# Altium PCB UL-SWAP-DAQ-1.PcbDoc (part 1 of 2)
Units mil, origin at the board's own origin, x right, y up, seen from the top; angles counter-clockwise.
Board outline 4000 x 4000 mil, 2 copper layers (Top Layer, Bottom Layer); 116 components, 150 nets, 387 pads, 16 vias.
Unrouted connection lines stored in the file: 128.
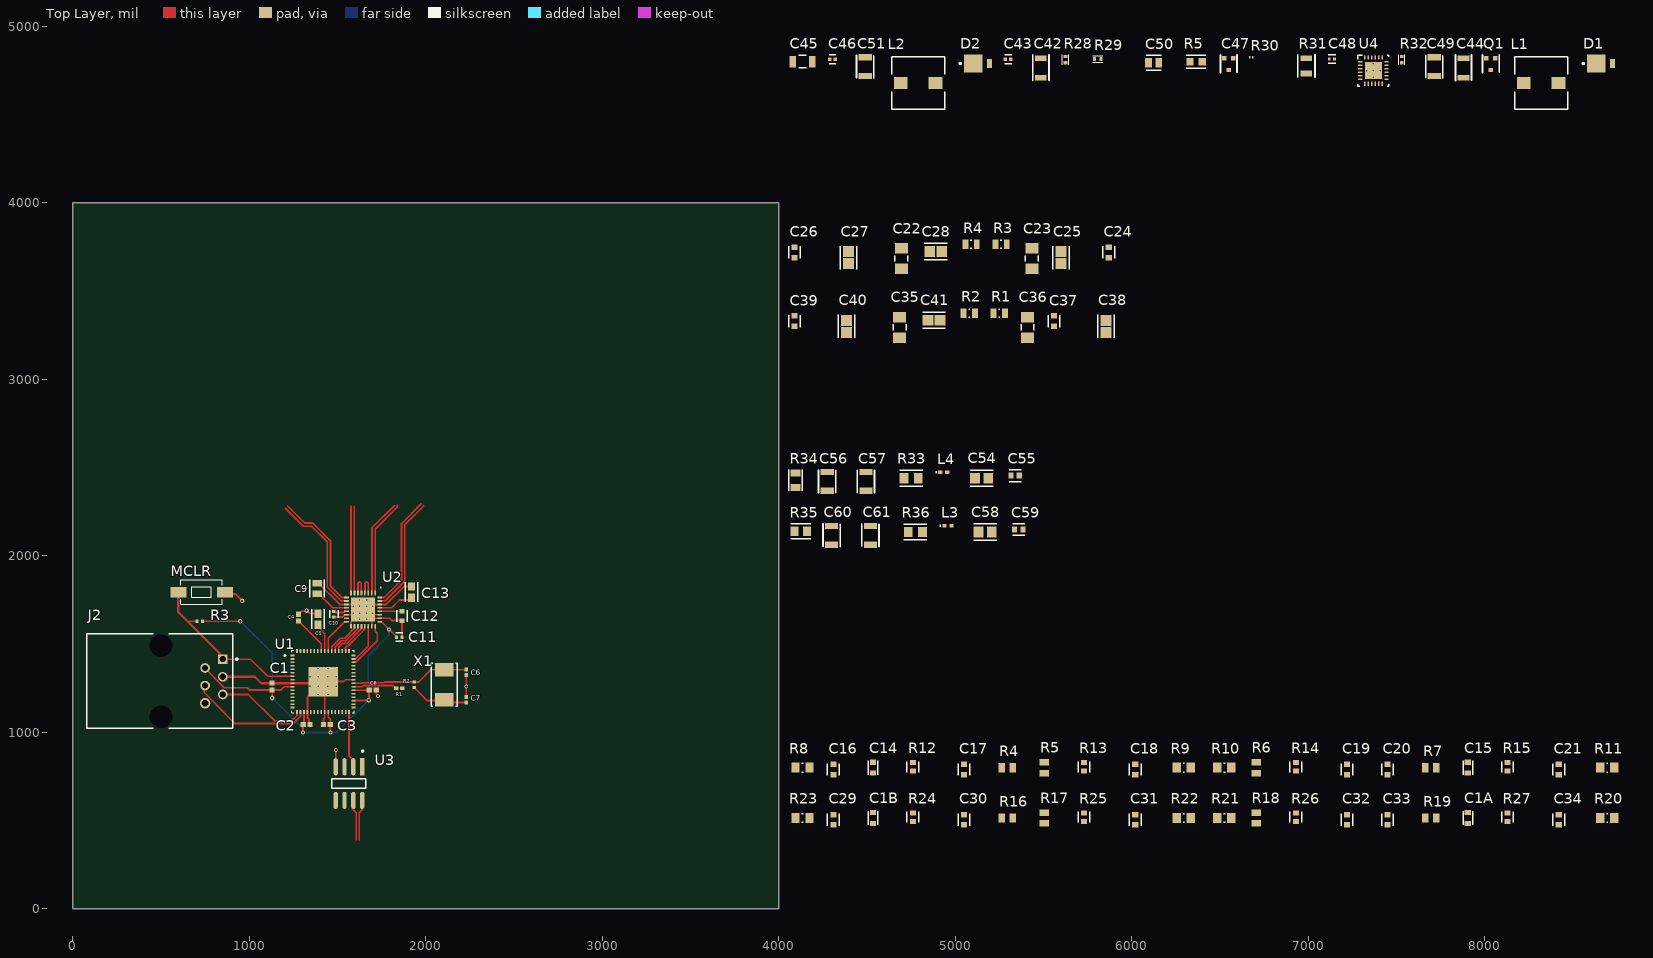
[diagram p0: Top Layer view]
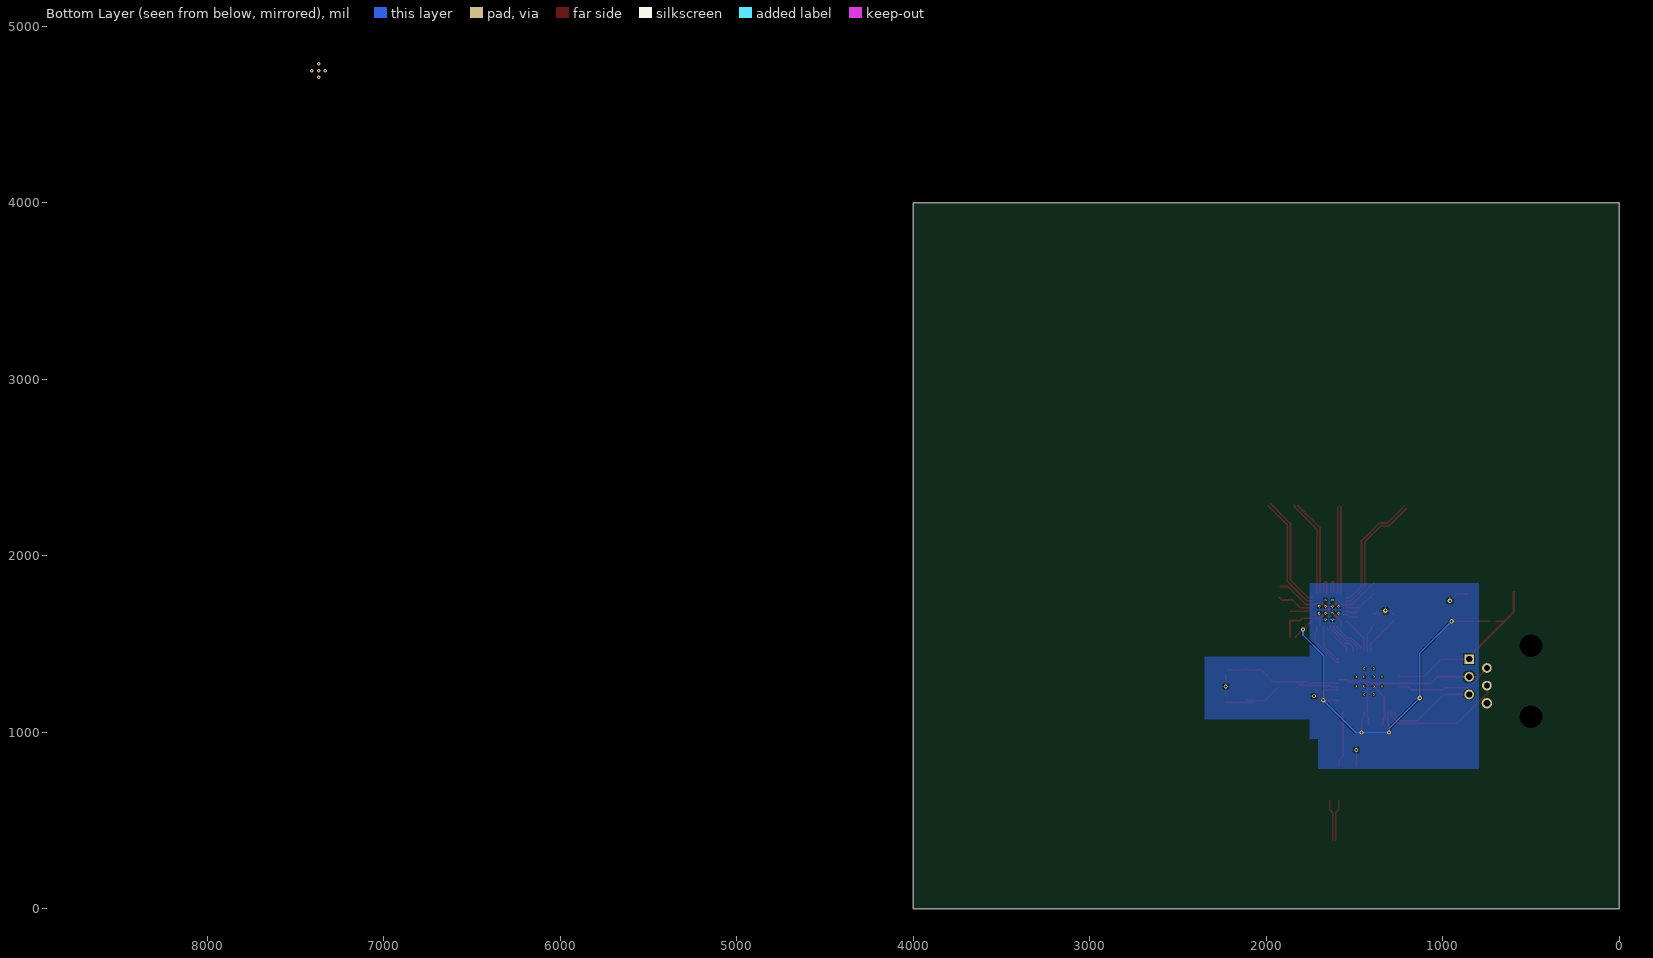
[diagram p1: Bottom Layer view, seen from below]

## Layer stack, top to bottom
Top Solder: solder mask 0.4, Solder Resist, Dk 3.5
Top Layer: signal copper 1.4
Dielectric 1: dielectric 12.6, FR-4, Dk 4.8
Bottom Layer: signal copper 1.4
Bottom Solder: solder mask 0.4, Solder Resist, Dk 3.5

## Board outline
0,0 4000,0 4000,4000 0,4000

## Design rules (kind name [scope] priority, off if disabled: settings)
Clearance [All] p1: gap=5 ignorepadtopadclearanceinfootprint=FALSE
DiffPairsRouting [All] p1: maxlimit=10 minlimit=5 mostfreqgap=8 toplayer_minwidth=5 toplayer_maxwidth=15 toplayer_prefwidth=6 bottomlayer_minwidth=5 bottomlayer_maxwidth=15 bottomlayer_prefwidth=6 maxuncoupledlength=500
PolygonConnect [All] p1: connectstyle=Relief reliefconductorwidth=10 reliefentries=4 polygonreliefangle="90 Angle" airgapwidth=10
RoomDefinition Signal_Conditioning [InComponentClass('Signal_Conditioning')] p1: confinementstyle=ConfineIn formatcopy=TRUE lockcomponents=FALSE outline 0,0 2000,0 2000,1000 0,1000
RoomDefinition PGA1 [InComponentClass('PGA1')] p2: confinementstyle=ConfineIn formatcopy=TRUE lockcomponents=FALSE outline 0,0 2000,0 2000,1000 0,1000
RoomDefinition Diff_Amp_1 [InComponentClass('Diff_Amp_1')] p3: confinementstyle=ConfineIn formatcopy=TRUE lockcomponents=FALSE outline 0,0 2000,0 2000,1000 0,1000
RoomDefinition ADC_Subsystem [InComponentClass('ADC_Subsystem')] p4: confinementstyle=ConfineIn formatcopy=TRUE lockcomponents=FALSE outline 1185,1980 2230,1980 2255,1955 2255,1450 1245,1450 1185,1510
RoomDefinition PGA2 [InComponentClass('PGA2')] p5: confinementstyle=ConfineIn formatcopy=TRUE lockcomponents=FALSE outline 4045,210 7720,210 7720,4950 4045,4950
RoomDefinition TPS6513x [InComponentClass('TPS6513x')] p6: confinementstyle=ConfineIn formatcopy=TRUE lockcomponents=FALSE outline 4045,60 8750,60 8750,4950 4045,4950
RoomDefinition PIC32_Subsystem [InComponentClass('PIC32_Subsystem')] p7: confinementstyle=ConfineIn formatcopy=TRUE lockcomponents=FALSE outline 515,2035 515,510 2475,510 2560,595 2560,2045
RoomDefinition LVDS_Driver_Subsystem [InComponentClass('LVDS_Driver_Subsystem')] p8: confinementstyle=ConfineIn formatcopy=TRUE lockcomponents=FALSE outline 1315,945 1315,435 1355,395 1780,395 1780,885 1725,940
RoomDefinition "LMR51420 5V" [InComponentClass('LMR51420 5V')] p9: confinementstyle=ConfineIn formatcopy=TRUE lockcomponents=FALSE outline 4045,2345 6690,2345 6690,4460 4045,4460
RoomDefinition "LMR51420 3.3V" [InComponentClass('LMR51420 3.3V')] p10: confinementstyle=ConfineIn formatcopy=TRUE lockcomponents=FALSE outline 4045,2040 5485,2040 5485,2295 4045,2295
RoomDefinition ICD4_INTERFACE_MODULE [InComponentClass('ICD4_INTERFACE_MODULE')] p11: confinementstyle=ConfineIn formatcopy=TRUE lockcomponents=FALSE outline 15,1700 64.48,1649.51 970,1649.51 970,675 781.97,866.87 34.79,866.87
RoomDefinition Diff_Amp_2 [InComponentClass('Diff_Amp_2')] p12: confinementstyle=ConfineIn formatcopy=TRUE lockcomponents=FALSE outline 4045,720 8790,720 8790,960 4045,960
RoutingVias [All] p1: holewidth=12 width=26 viastyle="Through Hole" minholewidth=6 minwidth=12 maxholewidth=30 maxwidth=50
ShortCircuit [All] p1: allowed=TRUE
SolderMaskExpansion [All] p1: expansion=0 istentingtop=FALSE
UnRoutedNet [All] p1: checkbadconnections=TRUE
Width [All] p1: maxlimit=30 minlimit=5 preferedwidth=6 minimp=50.000000 maximp=50.000000 favimp=50.000000
27 further rules are at their usual default settings.

## Classes and differential pairs
net class N000-1_[0..8]: N000-1_0 N000-1_1 N000-1_2 N000-1_3 N000-1_4 N000-1_5 N000-1_6 N000-1_7 N000-1_8
component class TPS6513x: C42 C43 C44 C45 C46 C47 C48 C49 C50 C51 D1 D2 L1 L2 Q1 R5 R28 R29 R30 R31 R32 U4
component class Signal_Conditioning: B1
component class PIC32_Subsystem: C1 C2 C3 C4 C5 C6 C7 C8 MCLR R1 R2 R3 U1 X1
component class PGA2: C22 C23 C24 C25 C26 C27 C28 PGA2 R3 R4
component class PGA1: C35 C36 C37 C38 C39 C40 C41 PGA1 R1 R2
component class LVDS_Driver_Subsystem: U3
component class "LMR51420 5V": B1 C54 C55 C56 C57 L4 R33 R34
component class "LMR51420 3.3V": B2 C58 C59 C60 C61 L3 R35 R36
component class ICD4_INTERFACE_MODULE: J2
component class Diff_Amp_2: AmpC AmpD C14 C15 C16 C17 C18 C19 C20 C21 R4 R5 R6 R7 R8 R9 R10 R11 R12 R13 R14 R15
component class Diff_Amp_1: AmpA AmpB C1A C1B C29 C30 C31 C32 C33 C34 R16 R17 R18 R19 R20 R21 R22 R23 R24 R25 R26 R27
component class ADC_Subsystem: C9 C10 C11 C12 C13 U2
differential pair DOUT: +DOUT_P -DOUT_N
differential pair ADC_CH6_CH7: +ADC_CH6_CH7_P -ADC_CH6_CH7_N
differential pair ADC_CH4_CH5: +ADC_CH4_CH5_P -ADC_CH4_CH5_N
differential pair ADC_CH2_CH3: +ADC_CH2_CH3_P -ADC_CH2_CH3_N
differential pair ADC_CH0_CH1: +ADC_CH0_CH1_P -ADC_CH0_CH1_N

## Components (designator, comment, footprint, x,y, rotation, side; value= is the part's Value field where it differs from the comment)
C1 "0.1uF" CAPC1050X55X23ML05T13 1130,1260 r270 top
C1A "GQM1875C2ER10BB12D" FP-GQM187-0_15-MFG 7905,515 r90 top
C1B "GQM1875C2ER10BB12D" FP-GQM187-0_15-MFG 4535,515 r90 top
C2 "0.1uF" CAPC1050X55X23ML05T13 1325,1045 r180 top
C3 "0.1uF" CAPC1050X55X23ML05T13 1440,1045 r0 top
C4 "0.1uF" CAPC1050X55X23ML05T13 1280,1650 r270 top
C5 "10uF" FP-GRM188-0_1-e0_2_0_55-IPC_A 1390,1641.57 r90 top
C6 "18pF" CAPC1005X55X25LL05T10 2230,1340 r270 top
C7 "18pF" CAPC1005X55X25LL05T10 2230,1185 r90 top
C8 "0.1uF" CAPC1050X55X23ML05T13 1700,1240 r180 top
C9 "47uF" FP-C0805C476M9PACTU-MFG 1385,1815 r90 top
C10 "0.1uF" FP-GRM15-MFG 1480,1670 r270 top value=0.10μF
C11 "0.1uF" FP-GRM15-MFG 1850,1540 r180 top value=0.10μF
C12 "2.2uF" FP-GRM188-0_1-e0_2_0_5-MFG 1865,1660 r90 top
C13 "10uF" FP-GRM188-0_1-e0_2_0_55-IPC_A 1920,1795 r270 top
C14 "GQM1875C2ER10BB12D" FP-GQM187-0_15-MFG 4535,800 r90 top
C15 "GQM1875C2ER10BB12D" FP-GQM187-0_15-MFG 7905,800 r90 top
C16 "CC0603KRX7R9BB392" FP-CC0603-DA-MFG 4310,790 r90 top
C17 "CC0603KRX7R9BB392" FP-CC0603-DA-MFG 5050,790 r90 top
C18 "CC0603KRX7R9BB392" FP-CC0603-DA-MFG 6020,790 r90 top
C19 "CC0603KRX7R9BB392" FP-CC0603-DA-MFG 7220,790 r90 top
C20 "CC0603KRX7R9BB392" FP-CC0603-DA-MFG 7450,790 r90 top
C21 "CC0603KRX7R9BB392" FP-CC0603-DA-MFG 8420,790 r90 top
C22 "GRM3195C1H163JA01D" FP-GRM319-0_15-IPC_A 4695,3685 r90 top
C23 "GRM3195C1H163JA01D" FP-GRM319-0_15-IPC_A 5435,3685 r90 top
C24 "CC0603KRX7R7BB104" FP-CC0603-DA-MFG 5870,3720 r90 top value="100 nF"
C25 "C2012JB1A685K060AC" FP-C2012-060-0_2-IPC_A 5600,3690 r90 top
C26 "CC0603KRX7R7BB104" FP-CC0603-DA-MFG 4090,3720 r90 top value="100 nF"
C27 "C2012JB1A685K060AC" FP-C2012-060-0_2-IPC_A 4395,3690 r90 top
C28 "C2012JB1A685K060AC" FP-C2012-060-0_2-IPC_A 4890,3725 r0 top
C29 "CC0603KRX7R9BB392" FP-CC0603-DA-MFG 4310,505 r90 top
C30 "CC0603KRX7R9BB392" FP-CC0603-DA-MFG 5050,505 r90 top
C31 "CC0603KRX7R9BB392" FP-CC0603-DA-MFG 6020,505 r90 top
C32 "CC0603KRX7R9BB392" FP-CC0603-DA-MFG 7220,505 r90 top
C33 "CC0603KRX7R9BB392" FP-CC0603-DA-MFG 7450,505 r90 top
C34 "CC0603KRX7R9BB392" FP-CC0603-DA-MFG 8420,505 r90 top
C35 "GRM3195C1H163JA01D" FP-GRM319-0_15-IPC_A 4685,3295 r90 top
C36 "GRM3195C1H163JA01D" FP-GRM319-0_15-IPC_A 5410,3295 r90 top
C37 "CC0603KRX7R7BB104" FP-CC0603-DA-MFG 5560,3330 r90 top value="100 nF"
C38 "C2012JB1A685K060AC" FP-C2012-060-0_2-IPC_A 5855,3300 r90 top
C39 "CC0603KRX7R7BB104" FP-CC0603-DA-MFG 4090,3330 r90 top value="100 nF"
C40 "C2012JB1A685K060AC" FP-C2012-060-0_2-IPC_A 4385,3300 r90 top
C41 "C2012JB1A685K060AC" FP-C2012-060-0_2-IPC_A 4880,3335 r0 top
C42 "Comment" 4.7uF_C1206C475K3RACAUTO 5485,4820 r0 top value=4.7uF
C43 "C0402C104K8PAC" FP-C0402-BB-MFG 5300,4815 r0 top value="0.10 μF"
C44 "Comment" 4.7uF_C1206C475K3RACAUTO 7880,4820 r0 top value=4.7uF
C45 "C1206C472J5GAC" FP-C1206C-EB-MFG 4135,4800 r0 top value="4,700 pF"
C46 "C0402C103J4RAC" FP-C0402-BB-MFG 4305,4815 r0 top value="10,000 pF"
C47 "Comment" PCBComponent_1 6550,4820 r0 top value=220nF
C48 "CGA1A2C0G1E6R8D030BA" FP-CGA1A-0_1-0_03-IPC_B 7135,4815 r0 top
C49 "Comment" Cap22uF_C1206C226M4PAC7800 7715,4825 r0 top value=22uF
C50 "C0805C759D5GACTU" FP-C0805C-DN-MFG 6125,4795 r0 top value="7.5 pF"
C51 "Comment" Cap22uF_C1206C226M4PAC7800 4490,4825 r0 top value=22uF
C54 "UMK212BBJ225MD-T" FP-0805-L_2_0_0_2-W_1_25-IPC_A 5150,2440 r0 top
C55 "C0603C104K4PAC7867" FP-C0603C-CF-MFG 5340,2455 r0 top value="0.10 μF"
C56 "Comment" Cap22uF_C1206C226M4PAC7800 4275,2475 r0 top value=22uF
C57 "Comment" Cap22uF_C1206C226M4PAC7800 4495,2475 r0 top value=22uF
C58 "UMK212BBJ225MD-T" FP-0805-L_2_0_0_2-W_1_25-IPC_A 5170,2135 r0 top
C59 "C0603C104K4PAC7867" FP-C0603C-CF-MFG 5360,2150 r0 top value="0.10 μF"
C60 "Comment" Cap22uF_C1206C226M4PAC7800 4300,2170 r0 top value=22uF
C61 "Comment" Cap22uF_C1206C226M4PAC7800 4520,2170 r0 top value=22uF
D1 "MBRM120ET3G" ONSC-POWERMITE-2-457-04_D_V 8685,4790 r0 top
D2 "MBRM120ET3G" ONSC-POWERMITE-2-457-04_D_V 5155,4790 r0 top
J2 "5520470-3" TECO-5520470-3_V 555,1290 r270 top
L1 "7447789004" WE-PD-S-PB 8320,4680 r0 top
L2 "7447789004" WE-PD-S-PB 4790,4680 r0 top
L3 "MSS1260H-822MED" 0402-A 4960,2170 r0 top value=8.2uH
L4 "Inductor" 0402-A 4935,2475 r0 top value=10uH
MCLR "434121043816" 434121043816 730,1795 r180 top
Q1 "Comment" PCBComponent_1 8035,4820 r0 top
R1 "CRCW08050000Z0EA" RESC2013X50X30LL20T20 5250,3375 r0 top
R1 "0R" RESC1005X40X25NL05T10 1850,1250 r0 top
R2 "CRCW08050000Z0EA" RESC2013X50X30LL20T20 5080,3375 r0 top
R2 "1M" RESC1005X40X25LL05T05 1935,1270 r270 top
R3 "10k" RESC1005X40X25LL05T05 720,1630 r0 top
R3 "CRCW08050000Z0EA" RESC2013X50X30LL20T20 5260,3765 r0 top
R4 "ERJ-6ENF1241V" RESC2013X70X40LL20T20 5295,800 r0 top
R4 "CRCW08050000Z0EA" RESC2013X50X30LL20T20 5090,3765 r0 top
R5 "AC0603FR-10100RL" FP-AC0603-IPC_A 6365,4800 r0 top
R5 "ERJ-6ENF1241V" RESC2013X70X40LL20T20 5505,800 r90 top
R6 "ERJ-6ENF1241V" RESC2013X70X40LL20T20 6705,800 r90 top
R7 "ERJ-6ENF1241V" RESC2013X70X40LL20T20 7695,800 r0 top
R8 "RC0805FR-071KL" RESC2013X60X35ML10T20 4135,800 r0 top
R9 "RC0805FR-071KL" RESC2013X60X35ML10T20 6295,800 r0 top
R10 "RC0805FR-071KL" RESC2013X60X35ML10T20 6525,800 r0 top
R11 "RC0805FR-071KL" RESC2013X60X35ML10T20 8695,800 r0 top
R12 "CRCW060335K7FKEA" FP-CRCW0603-e3-IPC_C 4760,805 r90 top
R13 "CRCW060335K7FKEA" FP-CRCW0603-e3-IPC_C 5730,805 r90 top
R14 "CRCW060335K7FKEA" FP-CRCW0603-e3-IPC_C 6930,805 r90 top
R15 "CRCW060335K7FKEA" FP-CRCW0603-e3-IPC_C 8130,805 r90 top
R16 "ERJ-6ENF1241V" RESC2013X70X40LL20T20 5295,515 r0 top
R17 "ERJ-6ENF1241V" RESC2013X70X40LL20T20 5505,515 r90 top
R18 "ERJ-6ENF1241V" RESC2013X70X40LL20T20 6705,515 r90 top
R19 "ERJ-6ENF1241V" RESC2013X70X40LL20T20 7695,515 r0 top
R20 "RC0805FR-071KL" RESC2013X60X35ML10T20 8695,515 r0 top
R21 "RC0805FR-071KL" RESC2013X60X35ML10T20 6525,515 r0 top
R22 "RC0805FR-071KL" RESC2013X60X35ML10T20 6295,515 r0 top
R23 "RC0805FR-071KL" RESC2013X60X35ML10T20 4135,515 r0 top
R24 "CRCW060335K7FKEA" FP-CRCW0603-e3-IPC_C 4760,520 r90 top
R25 "CRCW060335K7FKEA" FP-CRCW0603-e3-IPC_C 5730,520 r90 top
R26 "CRCW060335K7FKEA" FP-CRCW0603-e3-IPC_C 6930,520 r90 top
R27 "CRCW060335K7FKEA" FP-CRCW0603-e3-IPC_C 8130,520 r90 top
R28 "Comment" 1Mohm_ESR01MZPF1004 5625,4830 r0 top value=1M
R29 "Comment" 200ohm_ESR01MZPF2000 5790,4815 r90 top value=.2K
R30 "Comment" 121k_RE0201BRE07121KL 6670,4825 r90 top value=121K
R31 "Comment" 130k_RGV3216P-1303-B-T1 6990,4820 r0 top value=130K
R32 "Comment" 1Mohm_ESR01MZPF1004 7530,4830 r0 top value=1M
R33 "RK73G2ATTD1003F" FP-RK73G2A-IPC_A 4750,2440 r0 top
R34 "Comment" RMCF0805FT13K7_13.7k 4095,2470 r0 top value=13.7K
R35 "RMCF0805FG22K1" FP-RMCF0805-IPC_B 4125,2140 r0 top
R36 "RK73G2ATTD1003F" FP-RK73G2A-IPC_A 4775,2135 r0 top
U1 "PIC32MX470-F512H-120MR" QFN50P900X900X100-65N 1418.23,1288.27 r0 top
U2 "LTC2373CUH-16#PBF" LTC_2373_Footprint 1645.51,1695.79 r270 top
U3 "ADN4661BRZ" FP-R-8-IPC_A 1565,710 r270 top
U4 "TPS6513x" RGE0024B_V 7370,4750 r0 top
X1 "20MHz" FP-ABM7-MFG 2105,1270 r270 top

## Footprints (in the part's own frame and the unit in brackets; to place one, negate y for a bottom-side part, rotate by r counter-clockwise, add the part's x,y. Pads: shape width x height; smd on the part's side, far side on the other; paste and mask are expansions set on the pad)
1Mohm_ESR01MZPF1004 [mm]
  rect 0.55x0.45 smd: 7(0,0) 8(0,-0.9)
  silkscreen extent -0.45,-1.18 0.45,0.27
4.7uF_C1206C475K3RACAUTO [mm]
  rect 1.7x0.8 smd: 13(0,0) 14(0,-2.8)
  silkscreen extent -1.15,-3.2 1.18,0.5
121k_RE0201BRE07121KL [mm]
  rect 0.35x0.2 smd: 9(0,0) 10(0,-0.42)
130k_RGV3216P-1303-B-T1 [mm]
  rect 1.65x0.8 smd: 5(0,0) 6(0,-2.2)
  silkscreen extent -1.25,-2.75 1.25,0.5
200ohm_ESR01MZPF2000 [mm]
  rect 0.55x0.45 smd: 7(0,0) 8(0,-0.9)
  silkscreen extent -0.45,-1.18 0.45,0.27
0402-A [mm] "Chip Inductor, Body 1.0x0.5mm, IPC High Density"
  rect 0.6x0.5 smd: 1(-0.5,0) 2(0.5,0)
  silkscreen extent -1.1,-0.15 -1.1,0.15, body extent -0.55,-0.3 0.55,0.3, height 0.55
434121043816 [mm] "6.0*3.5mm vertical type, SMD, height 4.3mm, black actuator, 160gf, T&R"
  rect 2.3x1.5 smd: 1(-3.35,0) 2(3.35,0)
  silkscreen extent -3,-1.75 3,1.75, body extent -4,-1.75 4,1.75, height 4.3
Cap22uF_C1206C226M4PAC7800 [mm]
  rect 1.9x0.9 smd: 7(0,0) 8(0,-2.7)
  silkscreen extent -1.25,-2.98 1.22,0.27
CAPC1005X55X25LL05T10 [mm] "Chip Capacitor, 2-Leads, Body 1.00x0.50mm, IPC High Density"
  rect 0.56x0.52 smd: 1(-0.39,0) 2(0.39,0)
  body extent -0.53,-0.28 0.53,0.28, height 0.55
CAPC1050X55X23ML05T13 [mm] "Chip Capacitor, 2-Leads, Body 1.05x0.55mm, IPC Low Density"
  rect 0.76x0.72 smd: 1(-0.49,0) 2(0.49,0)
  body extent -0.53,-0.28 0.53,0.27, height 0.55
FP-0805-L_2_0_0_2-W_1_25-IPC_A [mil]
  rect 55.42x61.5 smd paste+0 mask+0: 1(-37.49,0) 2(37.49,0)
  silkscreen extent -65,-46 65,46, body extent -85,-50 85,50, height 10
FP-ABM7-MFG [mm]
  rect 1.9x2.6 smd paste+0 mask+0: 1(-2.15,0) 2(2.15,0)
  silkscreen extent -3.1,-1.85 3.1,1.85, body extent -3.2,-1.95 3.2,1.95, height 0.25
FP-AC0603-IPC_A [mil]
  rect 41.68x39.85 smd paste+0 mask+0: 1(-34.52,0) 2(34.52,0)
  silkscreen extent -55,-36 55,36, body extent -75,-40 75,40, height 10
FP-C0402-BB-MFG [mm]
  rect 0.52x0.52 smd paste+0 mask+0: 1(-0.4,0) 2(0.4,0)
  silkscreen extent -0.5,-0.64 0.5,0.64, body extent -0.8,-0.4 0.8,0.4, height 0.25
FP-C0603C-CF-MFG [mm]
  rect 0.75x0.9 smd paste+0 mask+0: 1(-0.6,0) 2(0.6,0)
  silkscreen extent -0.87,-0.85 0.88,0.85, body extent -1.2,-0.6 1.2,0.6, height 0.25
FP-C0805C476M9PACTU-MFG [mm]
  rect 0.95x1.35 smd paste+0 mask+0: 1(-0.75,0) 2(0.75,0)
  silkscreen extent -1.25,-1.05 1.25,1.05, body extent -1.4,-0.85 1.4,0.85, height 0.25
FP-C0805C-DN-MFG [mm]
  rect 0.95x1.35 smd paste+0 mask+0: 1(-0.75,0) 2(0.75,0)
  silkscreen extent -1.1,-1.07 1.1,1.07, body extent -1.4,-0.85 1.4,0.85, height 0.25
FP-C1206C-EB-MFG [mm]
  rect 0.95x1.7 smd paste+0 mask+0: 1(-1.4,0) 2(1.4,0)
  silkscreen extent -0.55,-0.9 0.55,0.9, body extent -2,-1 2,1, height 0.25
FP-C2012-060-0_2-IPC_A [mil]
  rect 62.13x61.27 smd paste+0 mask+0: 1(-34.02,0) 2(34.02,0)
  silkscreen extent -65,-46 65,46, body extent -85,-50 85,50, height 10
FP-CC0603-DA-MFG [mm]
  rect 0.8x0.9 smd paste+0 mask+0: 1(-0.75,0) 2(0.75,0)
  silkscreen extent -0.85,-0.85 0.85,0.85, body extent -1.43,-0.82 1.43,0.82, height 0.25
FP-CGA1A-0_1-0_03-IPC_B [mil]
  rect 15.08x16.46 smd paste+0 mask+0: 1(-14.47,0) 2(14.47,0)
  silkscreen extent -22,-24 22,24, body extent -28,-14 28,14, height 10
FP-CRCW0603-e3-IPC_C [mil]
  rect 28.94x33.94 smd paste+0 mask+0: 1(-24.23,0) 2(24.23,0)
  silkscreen extent -30,-33 30,33, body extent -43,-23 43,23, height 10
FP-GQM187-0_15-MFG [mm]
  rect 0.75x0.9 smd paste+0 mask+0: 1(-0.775,0) 2(0.775,0)
  silkscreen extent -1,-0.67 1,0.67, body extent -1.25,-0.58 1.25,0.58, height 0.25
FP-GRM15-MFG [mm]
  rect 0.4x0.5 smd paste+0 mask+0: 1(-0.4,0) 2(0.4,0)
  silkscreen extent -0.53,-0.63 0.53,0.63, body extent -0.7,-0.38 0.7,0.38, height 0.25
FP-GRM188-0_1-e0_2_0_5-MFG [mm]
  rect 0.65x0.7 smd paste+0 mask+0: 1(-0.675,0) 2(0.675,0)
  silkscreen extent -0.85,-0.75 0.85,0.75, body extent -1.1,-0.55 1.1,0.55, height 0.25
FP-GRM188-0_1-e0_2_0_55-IPC_A [mil]
  rect 47.57x39.85 smd paste+0 mask+0: 1(-31.57,0) 2(31.57,0)
  silkscreen extent -55,-36 55,36, body extent -75,-40 75,40, height 10
FP-GRM319-0_15-IPC_A [mil]
  rect 59.28x73.16 smd paste+0 mask+0: 1(-58.12,0) 2(58.12,0)
  silkscreen extent -17,-37 17,37, body extent -107,-56 107,56, height 10
FP-R-8-IPC_A [mil]
  rect 97.4x24.49 smd paste+0 mask+0: 1(-95.12,75)
  rrect100% 97.4x24.49 smd paste+0 mask+0: 2(-95.12,25) 3(-95.12,-25) 4(-95.12,-75) 5(95.12,-75) 6(95.12,-25) 7(95.12,25) 8(95.12,75)
  silkscreen extent -189,-96 27,96, body extent -164,-116 164,116, height 10
FP-RK73G2A-IPC_A [mil]
  rect 49.42x57.56 smd paste+0 mask+0: 1(-40.37,0) 2(40.37,0)
  silkscreen extent -65,-45 65,45, body extent -85,-48 85,48, height 10
FP-RMCF0805-IPC_B [mil]
  rect 45.46x53.63 smd paste+0 mask+0: 1(-34.48,0) 2(34.48,0)
  silkscreen extent -57,-43 57,43, body extent -67,-37 67,37, height 10
LTC_2373_Footprint [mm]
  rrect40% 0.7x0.25 smd: 1(-2.4,1.75) 2(-2.4,1.25) 3(-2.4,0.75) 4(-2.4,0.25) 5(-2.4,-0.25) 6(-2.4,-0.75) 7(-2.4,-1.25) 8(-2.4,-1.75) 17(2.4,-1.75) 18(2.4,-1.25) 19(2.4,-0.75) 20(2.4,-0.25) 21(2.4,0.25) 22(2.4,0.75) 23(2.4,1.25) 24(2.4,1.75)
  rrect40% 0.25x0.7 smd: 9(-1.75,-2.4) 10(-1.25,-2.4) 11(-0.75,-2.4) 12(-0.25,-2.4) 13(0.25,-2.4) 14(0.75,-2.4) 15(1.25,-2.4) 16(1.75,-2.4) 25(1.75,2.4) 26(1.25,2.4) 27(0.75,2.4) 28(0.25,2.4) 29(-0.25,2.4) 30(-0.75,2.4) 31(-1.25,2.4) 32(-1.75,2.4)
  rect 3.45x3.45 smd: 33(0,0)
  body extent -2.54,-2.54 2.54,2.54, height 0.81
ONSC-POWERMITE-2-457-04_D_V [mil] "POWERMITE, 2-Leads, Body 1.965x1.9mm"
  rect 105.12x100 smd: 1(-52.56,0)
  rect 30x50 smd: 2(40,0)
  silkscreen extent -132,-5 -122,5, body extent -80,-37 -3,37, height 45
PCBComponent_1 [mm]
  rect 0.6x0.6 smd: 15(-0.65,0) 16(0.65,0) 17(0,-1.7)
  silkscreen extent -1.2,-2.1 1.2,0.5
QFN50P900X900X100-65N [mm]
  rrect25% 0.6x0.24 smd: 1(-4.4,3.75) 2(-4.4,3.25) 3(-4.4,2.75) 4(-4.4,2.25) 5(-4.4,1.75) 6(-4.4,1.25) 7(-4.4,0.75) 8(-4.4,0.25) 9(-4.4,-0.25) 10(-4.4,-0.75) 11(-4.4,-1.25) 12(-4.4,-1.75) 13(-4.4,-2.25) 14(-4.4,-2.75) 15(-4.4,-3.25) 16(-4.4,-3.75) 33(4.4,-3.75) 34(4.4,-3.25) 35(4.4,-2.75) 36(4.4,-2.25) 37(4.4,-1.75) 38(4.4,-1.25) 39(4.4,-0.75) 40(4.4,-0.25) 41(4.4,0.25) 42(4.4,0.75) 43(4.4,1.25) 44(4.4,1.75) 45(4.4,2.25) 46(4.4,2.75) 47(4.4,3.25) 48(4.4,3.75)
  rrect25% 0.24x0.6 smd: 17(-3.75,-4.4) 18(-3.25,-4.4) 19(-2.75,-4.4) 20(-2.25,-4.4) 21(-1.75,-4.4) 22(-1.25,-4.4) 23(-0.75,-4.4) 24(-0.25,-4.4) 25(0.25,-4.4) 26(0.75,-4.4) 27(1.25,-4.4) 28(1.75,-4.4) 29(2.25,-4.4) 30(2.75,-4.4) 31(3.25,-4.4) 32(3.75,-4.4) 49(3.75,4.4) 50(3.25,4.4) 51(2.75,4.4) 52(2.25,4.4) 53(1.75,4.4) 54(1.25,4.4) 55(0.75,4.4) 56(0.25,4.4) 57(-0.25,4.4) 58(-0.75,4.4) 59(-1.25,4.4) 60(-1.75,4.4) 61(-2.25,4.4) 62(-2.75,4.4) 63(-3.25,4.4) 64(-3.75,4.4)
  rect 4.25x4.25 smd paste-1.53: 65(0,0)
  round 0.3 hole 0.2 mask+0: 66(-0.695,1.875) 67(0.695,1.875) 68(-1.875,0.695) 69(-0.695,0.695) 70(0.695,0.695) 71(1.875,0.695) 72(-1.875,-0.695) 73(-0.695,-0.695) 74(0.695,-0.695) 75(1.875,-0.695) 76(-0.695,-1.875) 77(0.695,-1.875)
  silkscreen extent -5.59,-4.5 4.5,4.5, body extent -4.5,-4.5 4.5,4.5, height 1
RESC1005X40X25LL05T05 [mm] "Chip Resistor, 2-Leads, Body 1.05x0.55mm, IPC High Density"
  rect 0.45x0.45 smd: 1(-0.4,0) 2(0.4,0)
  body extent -0.53,-0.28 0.53,0.28, height 0.4
RESC1005X40X25NL05T10 [mm] "Chip Resistor, 2-Leads, Body 1.00x0.50mm, IPC Medium Density"
  rect 0.6x0.55 smd: 1(-0.425,0) 2(0.425,0)
  body extent -0.53,-0.27 0.53,0.28, height 0.4
RESC2013X50X30LL20T20 [mm] "Chip Resistor, 2-Leads, Body 2.00x1.25mm, IPC High Density"
  rect 0.85x1.35 smd: 1(-0.825,0) 2(0.825,0)
  silkscreen extent -0.1,-0.58 0.1,0.58, body extent -1.1,-0.72 1.1,0.72, height 0.5
RESC2013X60X35ML10T20 [mm] "Chip Resistor, 2-Leads, Body 2.1x1.35mm, IPC Low Density"
  rect 1.2x1.45 smd: 1(-1,0) 2(1,0)
  silkscreen extent -0.1,-0.62 0.1,0.62, body extent -1.05,-0.68 1.05,0.67, height 0.6
RESC2013X70X40LL20T20 [mm] "Chip Resistor, 2-Leads, Body 2.00x1.25mm, IPC High Density"
  rect 0.95x1.35 smd: 1(-0.775,0) 2(0.775,0)
  body extent -1.1,-0.72 1.1,0.72, height 0.7
RGE0024B_V [mm] "QFN, 24-Leads, Body 4x4mm, Pitch 0.5mm, Thermal Pad 2.45x2.45mm"
  rrect42% 0.6x0.24 smd: 1(-1.9,1.25) 2(-1.9,0.75) 3(-1.9,0.25) 4(-1.9,-0.25) 5(-1.9,-0.75) 6(-1.9,-1.25) 13(1.9,-1.25) 14(1.9,-0.75) 15(1.9,-0.25) 16(1.9,0.25) 17(1.9,0.75) 18(1.9,1.25)
  rrect42% 0.24x0.6 smd: 7(-1.25,-1.9) 8(-0.75,-1.9) 9(-0.25,-1.9) 10(0.25,-1.9) 11(0.75,-1.9) 12(1.25,-1.9) 19(1.25,1.9) 20(0.75,1.9) 21(0.25,1.9) 22(-0.25,1.9) 23(-0.75,1.9) 24(-1.25,1.9)
  rrect4% 2.45x2.45 smd paste-1.225: 25(0,0)
  silkscreen extent -2.22,-2.22 2.22,2.22, body extent -2.07,-2.07 2.07,2.07, height 1.01
RMCF0805FT13K7_13.7k [mm]
  rect 1.4x1 smd: 9(0,0) 10(0,-2.1)
  silkscreen extent -0.98,-2.55 0.98,0.45
TECO-5520470-3_V [mm] "THD, 6-Leads, Body 20.96x13.59mm, Pitch 1.27mm"
  rect 1.4x1.4 hole 0.89: 1(-3.175,7.5)
  round 1.4 hole 0.89: 2(-1.905,4.96) 3(-0.635,7.5) 4(0.635,4.96) 5(1.905,7.5)
  round 1.5 hole 1: 6(3.175,4.96)
  round 3 hole 3.25 unplated: MH1(-5.075,-1.39) MH2(5.085,-1.39)
  silkscreen extent -6.8,-12.06 6.8,9.62, body extent -7.87,-12.06 7.87,8.9, height 16.04
WE-PD-S-PB [mm] "SMD Inductor, 2-Leads, Body 7.3x7.3x3.5 mm"
  rect 2x1.7 smd: 1(-2.5,0) 2(2.5,0)
  silkscreen extent -3.8,-3.8 3.8,3.8, body extent -3.65,-3.65 3.65,3.65, height 3.19

## Part data
C1 C2 C3 C4 C8: library part CMP-2000-05439-1, "Chip Capacitor, 100 nF, +/- 10%, 16 V, -55 to 125 degC, 0402 (1005 Metric), RoHS, Tape and Reel / CL05B104KO5NNNC", Capacitance=100000pF, Case Size/Dimension=0402, Dielectric=X7R, Manufacturer="Samsung Electro-Mechanics", Rated Voltage=16V, Tolerance (%)=±10%, Datasheet URL=https://datasheet.ciiva.com/29198/458718-da-01-en-vs-kondensator-0402-29198423.pdf, Datasheet Version=Nov-10, Manufacturer URL=http://www.samsungsem.com/global/index.jsp
C1A C1B C14 C15: library part CMP-06035-052255-1, "Ceramic Capacitor 0.1pF ±0.1pF 250VDC C0G 0603 Paper T/R", Capacitance=0.1pF, Case Code (Imperial)=0603, Case Code (Metric)=1608, Dielectric=C0G, Max Operating Temperature=125°C, Min Operating Temperature=-55°C, Package Quantity=4000, Voltage Rating=250V, Case/Package=0603, Depth=0.8mm, Height=0.7mm, Length=1.6mm, Mount="Surface Mount", Packaging="Tape and Reel", Radiation Hardening=No, Termination=SMD/SMT, Thickness=0.031inch, Voltage Rating (DC)=250V, Width=0.031inch
C5 C13: library part CMP-2006-02792-2, "Chip Multilayer Ceramic Capacitors for General Purpose, 0603, 10uF, X5R, 15%, 20%, 6.3V / GRM188R60J106ME47D", Case Code (Imperial)=0603, Case Code (Metric)=1608, Dielectric=X5R, Max Operating Temperature=85°C, Min Operating Temperature=-55°C, Package Quantity=4000, Tolerance=20%, Voltage=6.3V, Capacitance=10uF, Case/Package=0603, Depth=0.8mm, Height=0.8mm, Lead Free="Lead Free", Length=1.6mm, Material=Ceramic, Mount="Surface Mount", Packaging="Tape and Reel", Radiation Hardening=No, REACH SVHC="No SVHC", Termination=SMD/SMT, Thickness=0.035inch, Voltage Rating=6.3V, Voltage Rating (DC)=6.3V, Width=0.031inch
C6 C7: library part CMP-2008-04271-1, "GRM1555C1H180GA01D", Manufacturer=Murata, Part Number=GRM1555C1H180GA01D
C9: library part CMP-2007-01008-2, "CAP CER 47UF 6.3V X5R 0805 / C0805C476M9PACTU", Case Code (Imperial)=0805, Case Code (Metric)=2012, Dielectric=X5R, Dielectric Material=Ceramic, Max Operating Temperature=85°C, Min Operating Temperature=-55°C, Package Quantity=3000, Tolerance=20%, Voltage=6.3V, Capacitance=47uF, Case/Package=0805, Construction=Flat, Depth=1.25mm, Dissipation Factor=5%, Height=1.25mm, Length=2mm, Mount=PCB, Number of Pins=2, Packaging="Tape and Reel", Radiation Hardening=No, REACH SVHC="No SVHC", RoHS Compliant=Yes, Series=C0805C, Termination=SMD/SMT, Voltage Rating=6.3V, Voltage Rating (DC)=6.3V, Width=1.2mm
C10 C11: library part CMP-2100-03641-2, "CAP CER 0.1UF 16V X7R 0402 / GRM155R71C104KA88D", Capacitance=0.10μF, Manufacturer=Murata, Manufacturer Part Number=GRM155R71C104KA88D, Package=GRM15, Temperature="-55°C to +125°C", Temperature Characteristic=X7R, Temperature Range High=+125°C, Temperature Range Low=-55°C, Tolerance=10%, Voltage Rating=16Vdc, Category=Cap, ComponentLink2Description=Datasheet, ComponentLink2URL=https://search.murata.co.jp/Ceramy/image/img/A01X/G101/ENG/GRM155R71H471KA01-01A.pdf, Device Class L1="Passive Components", Device Class L2=Capacitors, Device Class L3="Ceramic Capacitors", Digikey Description="CAP CER 0.1UF 16V X7R 0402", Height=0.55mm, Ipc Land Pattern Name=CAPC10050X219, Lead Free=yes, Material=Ceramic, Mouser Description="0402 0.1 uF 16V ±10 % Tolerance X7R SMT Multilayer Ceramic Capacitor", Octopart=https://octopart.com/grm155r71c104ka88d-murata-196880, RoHS=TRUE, Standoff Height=0mm
C12: library part CMP-2006-02836-2, "Chip Multilayer Ceramic Capacitors for General Purpose, 0603, 2.2uF, X7R, 15%, 10%, 10V / GRM188R71A225KE15D", Case Code (Imperial)=0603, Case Code (Metric)=1608, Dielectric=X7R, Max Operating Temperature=125°C, Min Operating Temperature=-55°C, Package Quantity=1, Tolerance=10%, Voltage=10V, Capacitance=2.2uF, Case/Package=0603, Depth=0.8mm, Height=0.8mm, Lead Free="Lead Free", Length=1.6mm, Material=Ceramic, Mount="Surface Mount", Number of Pins=2, Packaging="Cut Tape", REACH SVHC="No SVHC", Termination=SMD/SMT, Thickness=0.035inch, Voltage Rating=10V, Voltage Rating (DC)=10V, Weight=7.1E-05oz, Width=0.031inch
C16 C17 C18 C19 C20 C21 C29 C30 C31 C32 C33 C34: library part CMP-03422-000635-2, "CAP CER 3900PF 50V X7R 0603", Capacitance=3.9nF, Case Code (Imperial)=0603, Case Code (Metric)=1608, Dielectric=X7R, Dielectric Material=Ceramic, Insulation Resistance=100GR, Max Operating Temperature=125°C, Min Operating Temperature=-55°C, Package Quantity=4000, Tolerance=10%, Voltage=50V, Case/Package=0603, Construction=Flat, Depth=0.8mm, Halogen Free="Halogen Free", Height=0.8mm, Lead Free="Lead Free", Length=1.6mm, Mount="Surface Mount", Number of Pins=2, Packaging="Tape and Reel", Radiation Hardening=No, REACH SVHC="No SVHC", Resistor Type=Ceramic, RoHS Compliant=Yes, Series=CC, Termination=SMD/SMT, Thickness=0.035inch, Voltage Rating=50V, Voltage Rating (DC)=50V, Width=0.8mm
C22 C23 C35 C36: library part CMP-06035-007665-1, "Chip Multilayer Ceramic Capacitors for General Purpose, 1206, 16000pF, C0G, 30ppm/°C, 5%, 50V", Capacitance=16nF, Case Code (Imperial)=1206, Case Code (Metric)=3216, Dielectric=C0G, Max Operating Temperature=125°C, Min Operating Temperature=-55°C, Package Quantity=4000, Tolerance=5%, Voltage Rating=50V, Case/Package=1206, Depth=1.6mm, Height=0.85mm, Length=3.2mm, Mount="Surface Mount", Packaging="Tape and Reel", Radiation Hardening=No, Termination=SMD/SMT, Thickness=0.037inch, Voltage Rating (DC)=50V, Width=0.063inch
C24 C26 C37 C39: library part CMP-2000-05002-2, "CAP CER 0.1UF 16V X7R 0603", Capacitance="100 nF", Manufacturer=YAGEO, Package=CC0603-DA, Temperature="-55°C to +125°C", Temperature Characteristic=X7R, Temperature Coefficient=15%, Temperature Range High=+125°C, Temperature Range Low=-55°C, Tolerance=0.1, Voltage="16 V", Automotive=No, Category=Cap, ComponentLink2Description=Datasheet, ComponentLink2URL=http://www.yageo.com/documents/recent/UPY-GPHC_X7R_6.3V-to-50V_18.pdf, Device Class L1="Passive Components", Device Class L2=Capacitors, Device Class L3="Ceramic Capacitors", Digikey Description="CAP CER 0.1UF 16V X7R 0603", Footprint Url=http://www.yageo.com/exep/pages/download/literatures/UPY-C_GEN_24.pdf, Height=0.9mm, Lead Free=Yes, Manufacturer Part Number=CC0603KRX7R7BB104, Material=Ceramic, Mouser Description="Multilayer Ceramic Capacitor, CC Series, 0.1 - F, - 10%, X7R, 16 V, 0603 [1608 Metric]", Octopart=https://octopart.com/cc0603krx7r7bb104-yageo-192941, RoHS=TRUE, Voltage Rating="16 V"
C25 C27 C28 C38 C40 C41: library part CMP-08246-004641-1, "Multilayer Ceramic Capacitors 6.8μF ±10% 10V JB SMD 0805", Capacitance=6.8uF, Case Code (Imperial)=2012, Case Code (Metric)=5032, Case/Package=0805, Dielectric Material=Ceramic, Max Operating Temperature=85°C, Min Operating Temperature=-25°C, Package Quantity=4000, Tolerance=10%, Voltage Rating=10V, Lead Free="Lead Free", Length=0.079inch, Mount="Surface Mount", Packaging="Tape and Reel", RoHS Compliant=Yes, Series=C, Thickness=0.028inch, Voltage Rating (DC)=10V, Width=0.049inch
C42 C44 C47 C49 C51 C56 C57 C60 C61: library part Cap, "Capacitor", LatestRevisionDate=17-Jul-2002, LatestRevisionNote="Re-released for DXP Platform.", PackageDescription="Radial Cap, Thru-Hole; 2 Leads; 0.3 in Pin Spacing", PackageReference=RAD-0.3, Published=8-Jun-2000, Publisher="Altium Limited"
C43: library part CMP-03020-000918-1, "C0402 0.10 μF X5R 10.00% 10 V", Capacitance="0.10 μF", Manufacturer=Kemet, Package=C0402-BB, Temperature="-55°C to +125°C", Temperature Characteristic=X5R, Temperature Coefficient=15%, Temperature Range High=+125°C, Temperature Range Low=-55°C, Tolerance=0.1, Voltage Rating="10 V", Automotive=No, Category=Cap, ComponentLink2Description=Datasheet, ComponentLink2URL=https://content.kemet.com/datasheets/KEM_C1002_X7R_SMD.pdf, Device Class L1="Passive Components", Device Class L2=Capacitors, Device Class L3="Ceramic Capacitors", Height=0.55mm, Ipc Land Pattern Name=CAPC10050X50, Lead Free=Yes, Manufacturer Part Number=C0402C104K8PAC, Material=Ceramic, Mouser Description="Cap-fxd 0.1UF +-10PCT 10V Cer X5R 0402 S", Octopart=https://octopart.com/c0402c104k8pac-kemet-2645080, RoHS=TRUE
C45: library part CMP-03020-017963-1, "C1206 4,700 pF C0G 5.00% 50 V", Capacitance="4,700 pF", Manufacturer=KEMET, Package=C1206C-EB, Temperature="-55°C to +150°C", Temperature Characteristic=C0G, Temperature Coefficient=15%, Temperature Range High=+150°C, Temperature Range Low=-55°C, Tolerance=0.05, Voltage Rating="50 V", Automotive=Yes, Automotive Grade="Grade 0", Category=Cap, ComponentLink2Description=Datasheet, ComponentLink2URL=https://content.kemet.com/datasheets/KEM_C1007_X8R_ULTRA_150C_SMD.pdf, Device Class L1="Passive Components", Device Class L2=Capacitors, Device Class L3="Ceramic Capacitors", Height=0.88mm, Ipc Land Pattern Name=CAPC320160X78, Lead Free=Yes, Manufacturer Part Number=C1206C472J5GAC, Material=Ceramic, Mouser Description="Multilayer Ceramic Capacitors MLCC - SMD/SMT 50volts 4700pF 5% C0G", Octopart=https://octopart.com/c1206c472j5gac-kemet-1350327, RoHS=TRUE
C46: library part CMP-03020-009089-1, "C0402 10,000 pF X7R 5.00% 16 V", Capacitance="10,000 pF", Manufacturer=Kemet, Package=C0402-BB, Temperature="-55°C to +125°C", Temperature Characteristic=X7R, Temperature Coefficient=15%, Temperature Range High=+125°C, Temperature Range Low=-55°C, Tolerance=0.05, Voltage Rating="16 V", Automotive=No, Category=Cap, ComponentLink2Description=Datasheet, ComponentLink2URL=https://content.kemet.com/datasheets/KEM_C1002_X7R_SMD.pdf, Device Class L1="Passive Components", Device Class L2=Capacitors, Device Class L3="Ceramic Capacitors", Height=0.55mm, Ipc Land Pattern Name=CAPC10050X50, Lead Free=Yes, Manufacturer Part Number=C0402C103J4RAC, Material=Ceramic, Mouser Description="Multilayer Ceramic Capacitors MLCC - SMD/SMT 16volts 0.01uF 5% X7R", Octopart=https://octopart.com/c0402c103j4rac-kemet-8293494, RoHS=TRUE
C48: library part CMP-08246-001552-1, "Cap Ceramic 6.8pF 25V C0G 0.5pF Pad SMD 0201 125°C Automotive T/R", Capacitance=6.8pF, Case Code (Imperial)=0201, Case Code (Metric)=0603, Dielectric=C0G, Max Operating Temperature=125°C, Min Operating Temperature=-55°C, Package Quantity=1, Ratings=AEC-Q200, Voltage Rating=25V, Case/Package=0201, Composition=Ceramic, Depth=0.3mm, Height=0.3mm, Length=0.6mm, Mount="Surface Mount", Packaging="Tape and Reel", Termination=SMD/SMT, Thickness=0.013inch, Voltage Rating (DC)=25V, Weight=6E-06oz, Width=0.012inch
C50: library part CMP-1036-00734-2, "CAP CER 7.5PF 50V NP0 0805", Capacitance="7.5 pF", Manufacturer=KEMET, Package=C0805C-DN, Temperature="-55°C to +125°C", Temperature Characteristic=C0G, Temperature Coefficient=30ppm/°C, Temperature Range High=+125°C, Temperature Range Low=-55°C, Tolerance="0.5 pF", Voltage Rating="50 V", Automotive=No, Category=Cap, ComponentLink2Description=Datasheet, ComponentLink2URL=https://content.kemet.com/datasheets/KEM_C1003_C0G_SMD.pdf, Device Class L1="Passive Components", Device Class L2=Capacitors, Device Class L3="Ceramic Capacitors", Digikey Description="CAP CER 7.5PF 50V NP0 0805", Height=0.88mm, Ipc Land Pattern Name=CAPC200125X78, Lead Free=Yes, Manufacturer Part Number=C0805C759D5GACTU, Material=Ceramic, Mouser Description="Multilayer Ceramic Capacitors MLCC - SMD/SMT 50volts 7.5pF C0G 0.5%", Octopart=https://octopart.com/c0805c759d5gactu-kemet-17134963, RoHS=TRUE
C54 C58: library part CMP-14477-004278-2, "Multilayer Ceramic Capacitor 2.2uF 50V X5R 20% SMD 0803 T/R", Capacitance=2.2uF, Case Code (Imperial)=0805, Case Code (Metric)=2012, Max Operating Temperature=85°C, Min Operating Temperature=-55°C, Tolerance=20%, Voltage Rating=50V, Case/Package=0805, Mount="Surface Mount", Packaging="Tape and Reel", RoHS Compliant=Yes
C55 C59: library part CMP-03020-002384-2, "CAP CER 0.1UF 16V X5R 0603", Capacitance="0.10 μF", Manufacturer=KEMET, Package=C0603C-CF, Temperature="-55°C to +125°C", Temperature Characteristic=X5R, Temperature Coefficient=30ppm/°C, Temperature Range High=+125°C, Temperature Range Low=-55°C, Tolerance=0.1, Voltage Rating="16 V", Automotive=Yes, Automotive Grade="Grade 1", Category=Cap, ComponentLink2Description=Datasheet, ComponentLink2URL=https://api.kemet.com/component-edge/download/datasheet/C0603C100J5GACAUTO.pdf, Device Class L1="Passive Components", Device Class L2=Capacitors, Device Class L3="Ceramic Capacitors", Digikey Description="CAP CER 0.1UF 16V X5R 0603", Height=0.87mm, Lead Free=Yes, Manufacturer Part Number=C0603C104K4PAC7867, Material=Ceramic, Octopart=https://octopart.com/c0603c104k4pactu-kemet-12592163, RoHS=TRUE
D1 D2: library part CMP-1055-00280-1, "Schottky Power Rectifier, 2-Pin Powermite, Pb-Free, Tape and Reel", Manufacturer="On Semiconductor", ComponentLink1Description="Manufacturer URL", ComponentLink1URL=http://www.onsemi.com/, ComponentLink2Description=Datasheet, ComponentLink2URL=http://www.onsemi.cn/pub_link/Collateral/MBRM120E-D.PDF, ComponentLink3Description="Package Specification", ComponentLink3URL=http://www.onsemi.com/pub_link/Collateral/457-04.PDF, Configuration=Single, DatasheetVersion="Rev. 3", IFSM Max (A)=50, Mounting Technology="Surface Mount", PackageDescription="2-Pin POWERMITE, Body 1.965 x 1.9 mm", PackageReference=POWERMITE-2-457-04, PackageVersion="Rev. F, 05/2013", Packing="Tape and Reel", PartNumber=MBRM120ET3G, RoHS=TRUE
J2: library part CMP-1682-00001-5, "Modular Jack, 6 Position, Right Angle, RoHS, Tray", Colour=Black, Current Rating="1.5 A", Manufacturer="TE Connectivity", Max Voltage Rating (AC)="150 V", Package Quantity=176, ComponentLink1Description="Manufacturer URL", ComponentLink1URL=http://www.te.com/, ComponentLink2Description=Datasheet, ComponentLink2URL=http://www.te.com/commerce/DocumentDelivery/DDEController?Action=srchrtrv&DocNm=5520470&DocType=Customer+Drawing&DocLang=English, Contact Finish=Gold, Contact Material=Bronze, Contact Plating=Gold, DatasheetVersion="Rev. B1, 03/2011", Height="16.13 mm", Housing Material=PBT, Lead Pitch="2.54 mm", Length="13.34 mm", Mount="Through Hole", Mounting Technology="Through Hole", PackageDescription="Female Header, Pitch 1.27 mm, 2 x 3 Position, Height 16.13 mm, Tail Length 4.32 mm", PackageReference=5520470-3, Packaging=Tray, Pins=6, REACH SVHC=Unknown, RoHSCompliant=true, Voltage Rating="150 V"
L1 L2: library part CMP-1396-00050-1, "SMD-Shielded Power Inductor WE-PD, L=4.70 µH", Inductance="4.70 ÂµH", Manufacturer="Wuerth Elektronik", ComponentLink1Description="Manufacturer URL", ComponentLink1URL=http://www.we-online.com, ComponentLink2Description=Datasheet, ComponentLink2URL=http://www.we-online.de/katalog/media/pdf/7447789004.pdf, PackageDescription="SMD Inductor, 2-Leads, Body 7.3 x 7.3 mm", PackageReference=WE-PD-S-PB, PartNumber=7447789004
L3: library part Inductor, "Inductor", Code_IEC=1005, Code_JEITA=0402, LatestRevisionDate=29-May-2009, LatestRevisionNote="IPC-7351 Footprint Added.", PackageDescription="Chip Inductor", PackageReference=0402-A, Published=8-Jun-2000, Publisher="Altium Limited"
MCLR: library part CMP-1459-00005-1, "WS-TASV SMD Tact Switch 6.0X3.5 mm", Manufacturer="Wuerth Elektronik", ComponentLink1Description="Manufacturer URL", ComponentLink1URL=http://www.we-online.com, ComponentLink2Description=Datasheet, ComponentLink2URL=http://katalog.we-online.de/em/datasheet/434121043816.pdf, NoPins=02, PackageReference=434121043816, PartNumber=434121043816
Q1: library part MOSFET-P, "P-Channel MOSFET", LatestRevisionDate=17-Jul-2002, LatestRevisionNote="Re-released for DXP Platform.", PackageDescription="TO, Flat Index; 3 In-Line, Axial Leads; Body Dia. 4.6mm; Lead Dia. 0.5 mm (max)", PackageReference=E3, PackageVersion=1995/1996, Published=8-Jun-2000, Publisher="Altium Limited"
R1 R2 R3 R4: library part CMP-2001-04896-1, Manufacturer="Vishay Dale", Part Number=CRCW08050000Z0EA
R1: library part CMP-1011-00001-2, "RC0402JR-070RL", Manufacturer="Yageo / Phycomp", Part Number=RC0402JR-070RL
R2: library part CMP-2002-00609-3, "Chip Resistor, 1 MOhm, +/- 1%, 100 mW, -55 to 155 degC, 0402 (1005 Metric), RoHS, Tape and Reel / ERJ-2RKF1004X", Case Code (Imperial)=0402, Case Code (Metric)=1005, Manufacturer="Basic Passives", Max Operating Temperature="155 degC", Min Operating Temperature="-55 degC", Package Quantity=10000, PartNumber=ERJ-2RKF1004X, Power Rating="100 mW", Resistance="1 MOhm", Tolerance=1%, Voltage Rating="50 V", Case\/Package=0402, ComponentLink1Description="Manufacturer URL", ComponentLink1URL=http://www.panasonic.com/, ComponentLink2Description=Datasheet, ComponentLink2URL=http://industrial.panasonic.com/cdbs/www-data/pdf/RDA0000/AOA0000C86.pdf, DatasheetVersion=04/2015, Height="0.35 mm", Length="1 mm", Mount="Surface Mount", Mounting Technology="Surface Mount", PackageDescription="2-Pin Surface Mount Device, Body 1 x 0.5 mm", PackageReference=0402, Packaging="Tape and Reel", Pins=2, Radiation Hardening=No, REACH SVHC=Yes, RoHSCompliant=true, Weight=2.8E-05oz, Width="0.5 mm"
R3: library part CMP-2000-07588-1, "Chip Resistor, 10 KOhm, +/- 1%, 0.1 W, -55 to 155 degC, 0402 (1005 Metric), RoHS, Tape and Reel / ERJ2RKF1002X", Case Code (Imperial)=0402, Case Code (Metric)=1005, Manufacturer=Panasonic, Max Operating Temperature=155degC, Max Power Dissipation=100mW, Min Operating Temperature=-55degC, Package Description="2-Pin Surface Mount Device, Body 1 x 0.5 mm", Package Quantity=1, Package Reference=402, Resistance=10KOhm, Temperature Coefficient=100ppm\/degreesC, Tolerance=1%, Voltage Rating=50V, Case\/Package=0402, Composition=ThickFilm, Contact Plating=Tin, Datasheet URL=https://industrial.panasonic.com/cdbs/www-data/pdf/RDA0000/AOA0000C304.pdf, Datasheet Version=02/2017, Depth=0.5mm, Height=0.35mm, Lead Free=LeadFree, Length=1mm, Manufacturer URL=http://www.panasonic.com/, Military Standard=Not, Mount=SurfaceMount, Mounting Technology=SurfaceMount, Number of Pins=2, Number of Terminations=2, Packaging=TapeandReel, Power Rating=100mW, Radiation Hardening=No, REACH SVHC=NoSVHC, RoHSCompliant=True, Termination=SMD/SMT, Voltage Rating (DC)=50V, Width=0.02inch
R4 R5 R6 R7 R16 R17 R18 R19: library part CMP-2001-04406-1, Manufacturer=Panasonic, Part Number=ERJ-6ENF1241V
R5: library part CMP-03412-011629-2, "RES 100Ω 1.00% 0.1W 0603", Case/Package=0603, Resistance=100R, Tolerance=1%, RoHS Compliant=Yes
R8 R9 R10 R11 R20 R21 R22 R23: library part CMP-2100-03671-1, "Chip Resistor, 1 KOhm, +/- 1%, 125 mW, -55 to 155 degC, 0805 (2012 Metric), RoHS, Tape and Reel", Case Code (Imperial)=0805, Case Code (Metric)=2012, Manufacturer=Yageo, Max Operating Temperature=155degC, Max Power Dissipation=125mW, Min Operating Temperature=-55degC, Package Description="2-Pin Surface Mounted Device, Body 2 x 1.25 mm", Package Quantity=1, Resistance=1KOhm, Temperature Coefficient=100ppm/degreesC, Tolerance=1%, Voltage Rating=150V, Case/Package=0805, Composition=ThickFilm, Datasheet URL=http://www.yageo.com/NewPortal/yageodocoutput?fileName=/pdf/R-Chip/PYu-RC_Group_51_RoHS_L_5.pdf, Datasheet Version="Rev. 5, 10/2016", Depth=1.25mm, Height=0.024inch, Lead Free=LeadFree, Length=0.079inch, Manufacturer URL=http://www.yageo.com/, Military Standard=Not, Number of Pins=2, Number of Terminations=2, Package Reference=0805, Packaging=TapeandReel, Power Rating=125mW, REACH SVHC=Unknown, RoHSCompliant=true, Termination=SMD/SMT, Voltage Rating (DC)=150V, Width=0.049inch
R12 R13 R14 R15 R24 R25 R26 R27: library part CMP-2000-03264-2, "RES Thick Film, 35.7kΩ, 1%, 0.1W, 100ppm/°C, 0603", Case Code (Imperial)=0603, Case Code (Metric)=1608, Max Operating Temperature=155°C, Max Power Dissipation=100mW, Min Operating Temperature=-55°C, Package Quantity=10, Resistance=35.7kR, Temperature Coefficient=100ppm/°C, Tolerance=1%, Voltage Rating=75V, Case/Package=0603, Composition="Thick Film", Contact Plating=Tin, Depth=0.85mm, Features="Automotive AEC-Q200", Height=0.45mm, Length=1.55mm, Military Standard=Not, Number of Pins=2, Number of Terminations=2, Packaging="Tape and Reel", Power Rating=100mW, Radiation Hardening=No, Termination=Solder, Weight=7.1E-05oz, Width=0.033inch
R28 R29 R30 R31 R32 R34: library part Res1, "Resistor", LatestRevisionDate=17-Jul-2002, LatestRevisionNote="Re-released for DXP Platform.", PackageDescription="Axial Device, Thru-Hole; 2 Leads; 0.3 in Pin Spacing", PackageReference=AXIAL-0.3, Published=8-Jun-2000, Publisher="Altium Limited"
R33 R36: library part CMP-04015-080178-1, "100kΩ ±1% 0.125W Chip Resistor 0805 Thick Film AEC-Q200 Qualified", Case Code (Imperial)=0805, Case Code (Metric)=2012, Max Operating Temperature=125°C, Min Operating Temperature=-55°C, Power Rating=125mW, Resistance=100kR, Temperature Coefficient=50ppm/°C, Tolerance=1%, Voltage Rating=150V, Packaging="Tape and Reel", RoHS Compliant=Yes, Series=RK73G, Termination=SMD/SMT
R35: library part CMP-26527-006791-1, "22.1kΩ ±1% 0.125W 0805 Thick Film Chip Resistor AEC-Q200 compliant", Case Code (Imperial)=0805, Case Code (Metric)=2012, Max Operating Temperature=155°C, Max Power Dissipation=125mW, Min Operating Temperature=-55°C, Package Quantity=10000, Resistance=22.1kR, Resistor Type="Thick Film", Temperature Coefficient=100ppm/°C, Tolerance=1%, Case/Package=0805, Contact Plating=Tin, Features="Automotive AEC-Q200", Height=0.026inch, Lead Free="Lead Free", Length=0.079inch, Mount="Surface Mount", Number of Terminations=2, Packaging="Tape and Reel", Radiation Hardening=No, RoHS Compliant=Yes, Series=RMCF, Width=0.049inch
U3: library part CMP-09093-000114-1, "IC DRIVER 1/0 8SOIC", Case/Package=SOIC, Max Operating Temperature=85°C, Max Supply Current=10mA, Max Supply Voltage=3.6V, Min Operating Temperature=-40°C, Min Supply Voltage=3V, Nominal Supply Current=7mA, Operating Supply Voltage=3.3V, Package Quantity=98, Data Rate=600Mbps, Height=1.5mm, Lead Free="Contains Lead", Length=5mm, Mount="Surface Mount", Number of Drivers=1, Number of Elements=1, Number of Pins=8, Number of Receivers=1, Operating Supply Current=7mA, Packaging=Rail/Tube, Propagation Delay=1.5ns, Radiation Hardening=No, REACH SVHC="No SVHC", RoHS Compliant=Yes, Series=-, Supply Current=7mA, Turn-On Delay Time=1.5ns, Width=4mm
U4: library part CMP-0347-00005-4, "Boost Inverting Buck-Boost Voltage Converter with 2.7 to 5.5 V Input and -15 to 15 V Output, -40 to 85 degC, 24-Pin VQFN (RGE), Green (RoHS & no Sb/Br)", Manufacturer="Texas Instruments", PartNumber=TPS65130RGER, Switching Frequency(Typ)(kHz)=1400, Code_JEDEC=MO-220, ComponentLink1Description=Datasheet, ComponentLink1URL=http://www.ti.com/general/docs/lit/getliterature.tsp?genericPartNumber=TPS65130&fileType=pdf, ComponentLink2Description="Package Specification", ComponentLink2URL=http://www.ti.com/litv/pdf/mpqf124f, DatasheetVersion=SLVS493B, Eco-Plan="Green (RoHS & no Sb/Br)", Mounting Technology="Surface Mount", PackageDescription="24-Pin Plastic Quad Flatpack No-Lead, 4 x 4 mm Body, 0.5 mm Pitch", PackageReference=RGE0024B, PackageVersion="revG, Jul-2011", Regulated Outputs(#)=2, SubFamily="Step-Up Regulator", Topology="Boost, Inverting Buck-Boost", Vin(Max)(V)=5.5, Vin(Min)(V)=2.7, Vout2(V)="-15 to -2", Vout(Max)(V)=15, Vout(Min)(V)=-15
X1: library part CMP-27762-013587-1, "Crystal 20MHz ±20ppm 18pF SMD-2 6mm x 3.5mm / ABM7-20.000MHZ-D2Y-T", Case/Package=CSMD, ESR (Equivalent Series Resistance)=50R, Frequency Stability=30ppm, Frequency Tolerance=20ppm, Load Capacitance=18pF, Max Operating Temperature=85°C, Min Operating Temperature=-40°C, Operating Frequency="20 MHz", Package Quantity=1000, Resistor Type=Ceramic, Contact Plating=Gold, Depth=3.5mm, Frequency=20MHz, Height=0.055inch, Lead Free="Lead Free", Length=6mm, Mount="Surface Mount", Number of Pins=2, Packaging="Tape and Reel", Radiation Hardening=No, Series=ABM7, Series Resistance=50R, Termination=SMD/SMT, Tolerance=20ppm, Width=0.138inch
L4: Code_IEC=1005, Code_JEITA=0402, LatestRevisionDate=29-May-2009, LatestRevisionNote="IPC-7351 Footprint Added.", PackageDescription="Chip Inductor", PackageReference=0402-A, Published=8-Jun-2000, Publisher="Altium Limited"

## Free pads (board coordinates)
  round 12 hole 8: ""(1590,1675) ""(1590,1715) ""(1625,1640) ""(1625,1715) ""(1625,1750) ""(1625.23,1675.96) ""(1665,1640) ""(1665,1675) ""(1665,1715) ""(1665,1750) ""(1700,1675) ""(1700,1715)

## Via types
v1: diameter 22, hole 12, Top Layer to Bottom Layer, 6 vias
v2: diameter 26, hole 12, Top Layer to Bottom Layer, 5 vias
v3: diameter 19.68, hole 7.87, Top Layer to Bottom Layer, 5 vias

## Nets (pads, with @x,y where several pads share a name; then routed paths per layer and width w, separated by ;. In a path a pad name is that pad's centre, name@x,y a point inside that pad or via, vN(x,y) a via of type N, cw(c..) or ccw(c..) an arc to the next point about the centre after c; other vN are vias at no path point)
+3.3V: C11.2 C43.1 L3.2 R5.1@6330.48,4800 R36.1 U2.25 U4.5 U4.6 | length 131.4
  Top Layer w10: U2.25 1740.08,1626.81 1749.41,1626.81 1834.25,1541.97 C11.2
+3.3V: C1.2 C2.2 C3.2 C4.2 C8.2 R3.2@735.75,1630 U1.10 U1.19 U1.26 U1.35 U1.38 U1.57 | length 3173.1
  Top Layer w10: R3.2@735.75,1630 v2(950,1630) ; 750.28,1365 750.28,1361.88 859.6,1252.56 989.27,1252.56 1001.12,1240.71 C1.2 ; v2(1130,1195) C1.2 ; U1.10 1197.83,1258.74 1179.8,1240.71 C1.2 ; C4.2 1280,1629.92 1408.39,1501.53 U1.57 ; v1(1305.35,1000.35) 1305.35,1044.65 C2.2 1309.69,1048.98 1309.69,1114.76 U1.19 ; U1.26 1447.76,1087.11 1459.29,1075.57 C3.2 1459.65,1044.65 v1(1459.65,1000.35) ; U1.35 1674.14,1180 v2(1677.07,1182.93) 1678.89,1184.75 1678.89,1238.18 C8.2 ; U1.38 C8.2@1669.13,1239.06
  Bottom Layer w10: v2(950,1630) 1130,1450 v2(1130,1195) 1302.7,1022.3 1302.7,1002.3 v1@1305,1000 ; v1(1305.35,1000.35) v1@1305,1000 ; v1(1459.65,1000.35) v1@1460,1000 ; v1(1791.83,1583.7) 1791.83,1551.83 1675,1435 1675,1185 v2(1677.07,1182.93) 1494.14,1000 v1@1460,1000 ; v1@1305,1000 v1@1460,1000
+5V: C13.2 C28.1 C41.1 L4.2 R33.2 U2.29 | length 213
  Top Layer w10: U2.29 1806.99,1705.63 1851.43,1750.08 1913.51,1750.08 C13.2@1928.43,1765
+10.5V: C48.1 D1.1 U4.23
-10V: C50.2 D2.2 U4.15
"A GP0": 
"A GP1": 
"A GP2": 
A_GP1: 
A_GP2: 
ADC_CH0_CH1_N: U2.32 | length 642.8
  Top Layer w10: U2.32 1748.7,1764.69 1749.54,1763.84 1763.78,1763.84 1863.03,1863.09 1863.03,2183.03 1975,2295
ADC_CH0_CH1_P: U2.31 | length 657.7
  Top Layer w10: U2.31 1748.7,1745 1749.54,1745.84 1771.24,1745.84 1881.03,1855.63 1881.03,2175.57 1987.73,2282.27
ADC_CH2_CH3_N: U2.2 | length 547.4
  Top Layer w10: U2.2 1694.72,1798.98 1695.57,1799.82 1695.57,2158.57 1822,2285
ADC_CH2_CH3_P: U2.1 | length 547.4
  Top Layer w10: U2.1 1714.41,1798.98 1713.57,1799.82 1713.57,2151.11 1840,2277.54 1840,2285
ADC_CH4_CH5_N: U2.8 | length 490.1
  Top Layer w10: U2.8 1576.61,1798.98 1577.46,1799.82 1577.46,2280
ADC_CH4_CH5_P: U2.7 | length 490.1
  Top Layer w10: 1595.46,2280 1595.46,1799.82 1596.3,1798.98 U2.7
ADC_CH6_CH7_N: U2.10 | length 713.2
  Top Layer w10: 1205,2270 1306.79,2168.21 1352.94,2168.21 1442,2079.14 1442,1823.63 1519.79,1745.84 1541.48,1745.84 1542.32,1745 U2.10
ADC_CH6_CH7_P: U2.9 | length 698.2
  Top Layer w10: 1217.73,2282.73 1314.25,2186.21 1360.39,2186.21 1460,2086.6 1460,1831.09 1527.24,1763.84 1541.48,1763.84 1542.32,1764.69 U2.9
ADC_CH_A+: C33.2 C34.1 R27.2
ADC_CH_A-: C32.1 C33.1 R26.2
ADC_CH_B+: C29.1 C30.1 R24.2
ADC_CH_B-: C30.2 C31.1 R25.2
ADC_CH_C+: C20.2 C21.1 R15.2
ADC_CH_C-: C19.1 C20.1 R14.2
ADC_CH_D+: C16.1 C17.1 R12.2
ADC_CH_D-: C17.2 C18.1 R13.2
ADCSDI_PIC32SDO: U1.52 U2.20 | length 208.1
  Top Layer w10: U1.52 1506.81,1482.79 1527.77,1503.75 1553.18,1503.75 1635.59,1586.16 1635.59,1601.22 U2.20
ADCSDO_PIC32SDI: U1.47 U2.22 | length 225.7
  Top Layer w10: U1.47 1591.73,1416.5 1602.03,1416.5 1675.04,1489.5 U2.22
"B GP0": 
"B GP1": 
"B GP2": 
C_GP0: 
CB: C55.1
CP: C46.1 U4.21
D_GP0: 
D_GP1: 
D_GP2: 
DOUT_N: U3.8 | length 231.5
  Top Layer w10: 1624,390 1624,545.18 1640,561.18 U3.8
DOUT_P: U3.7 | length 231.5
  Top Layer w10: U3.7 1590,561.18 1606,545.18 1606,390
FB: R33.1
GND: C1.1 C1A.2 C1B.2 C2.1 C3.1 C4.1 C5.2 C6.2 C7.2 C8.1 C9.2 C10.2 C11.1 C12.1 C13.1 C14.2 C15.2 C16.2 C18.2 C19.2 C21.2 C22.2 C23.2 C24.2 C25.2 C26.2 C27.2 C28.2 C29.2 C31.2 C32.2 C34.2 C35.2 C36.2 C37.2 C38.2 C39.2 C40.2 C41.2 C43.2 C45.2 C46.2 C54.2 C58.2 J2.3 L2.1 MCLR.1 pad. R4.1@5264.49,800 R7.1 R16.1 R19.1 R35.1 U1.9 U1.20 U1.25 U1.41 U1.65 U2.11 U2.14 U2.15 U2.17 U2.23 U2.26 U2.27 U2.30 U2.33 U3.4 U4.2 U4.3 U4.19 | length 3148.3